# Altium PCB FOB - lower.PcbDoc
Units mm, origin at the board's own origin, x right, y up, seen from the top; angles counter-clockwise.
Board outline 54.5 x 16.6 mm, 2 copper layers (Top Layer, Bottom Layer); 25 components, 55 nets, 111 pads, 119 vias.
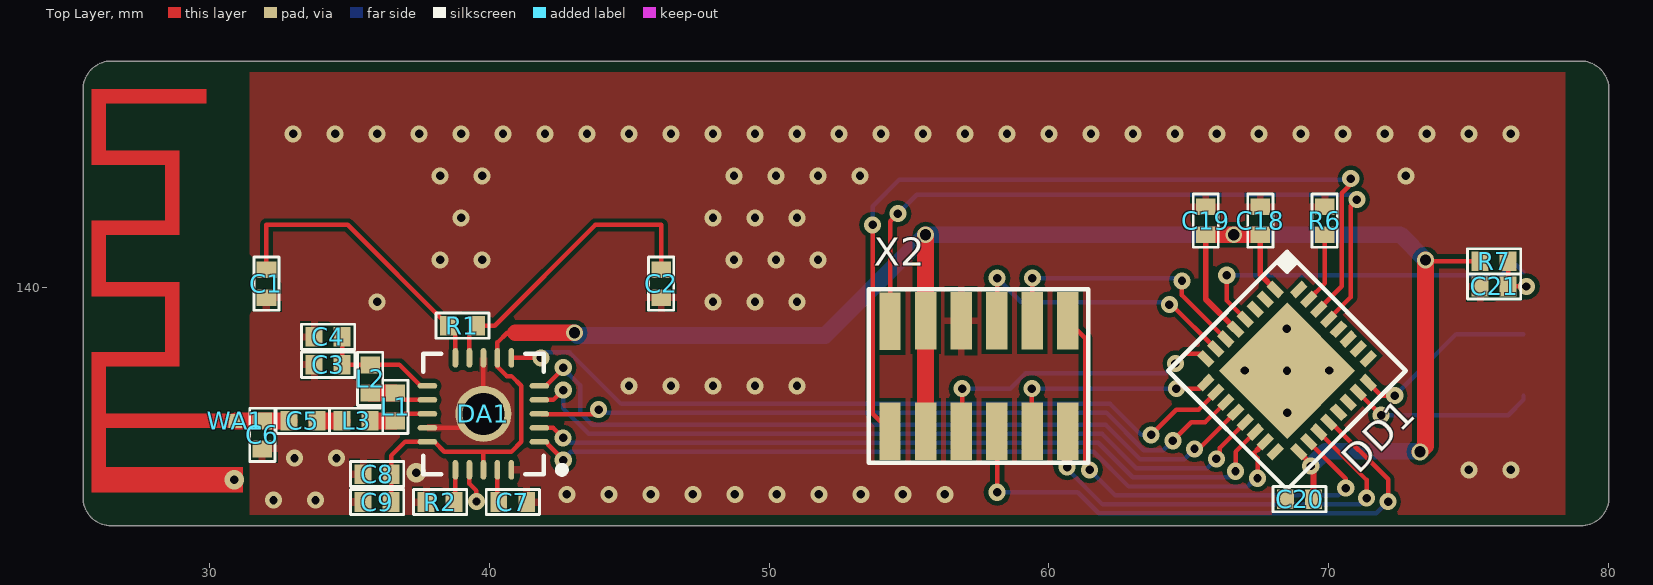
[diagram p0: Top Layer view]
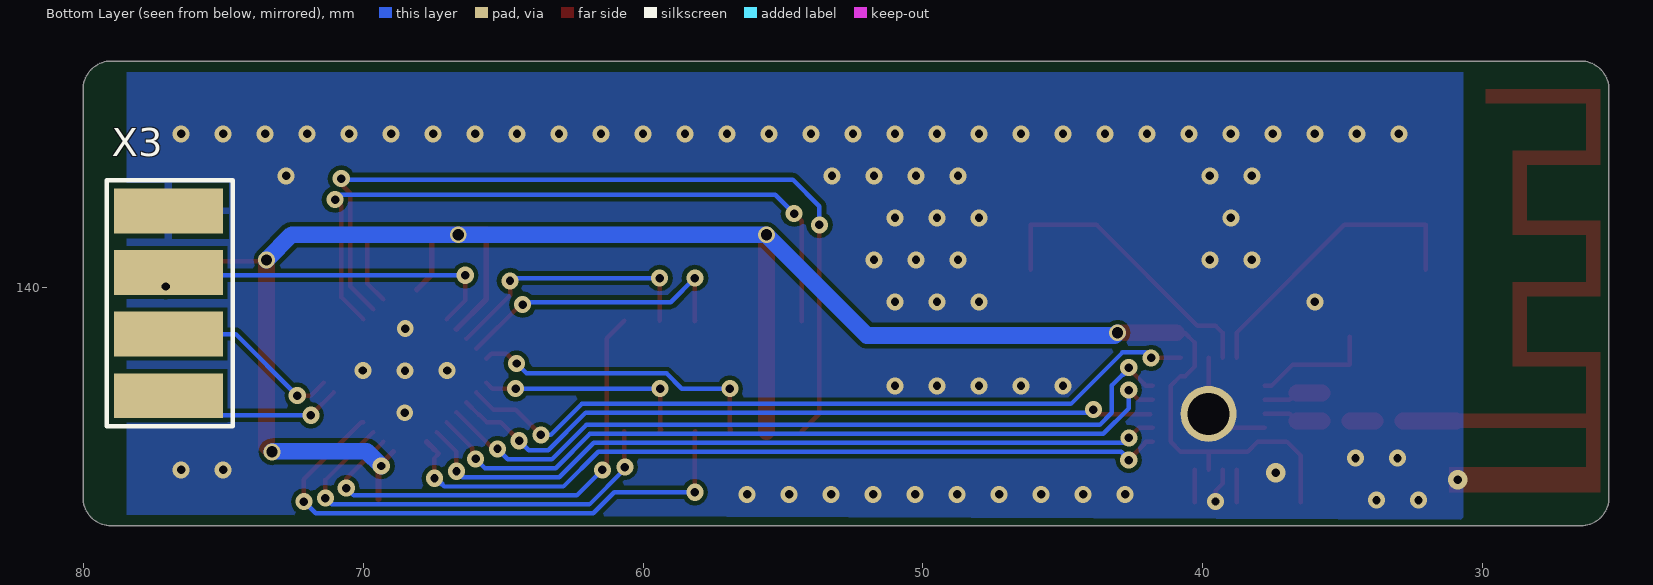
[diagram p1: Bottom Layer view, seen from below]
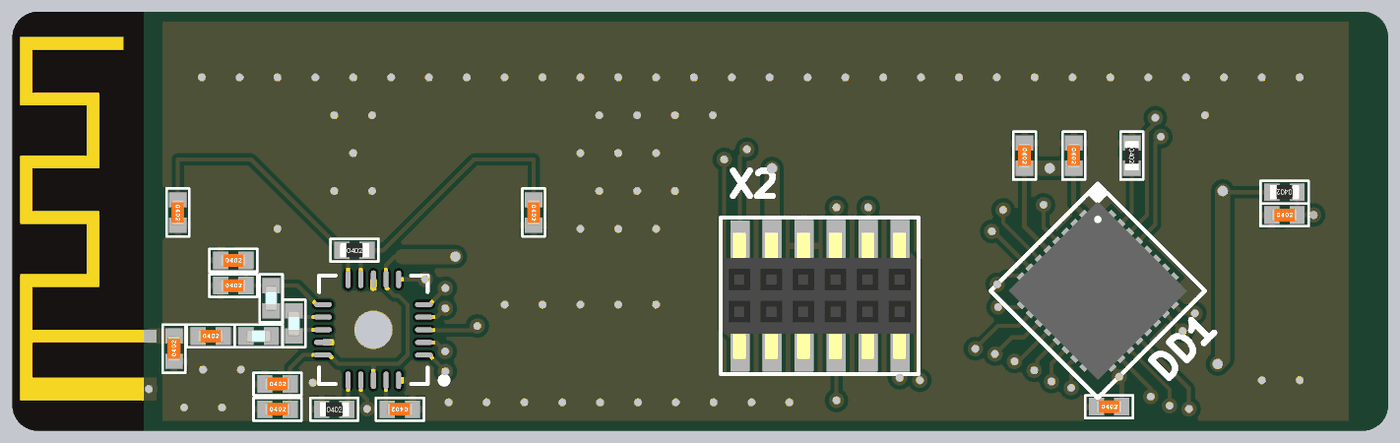
[diagram p2: 3D render of the assembled board from above, using the file's embedded part models]

## Layer stack, top to bottom
Top Solder: solder mask 0.0102, Solder Resist, Dk 3.5
Top Layer: signal copper 0.0356
Dielectric 1: dielectric 0.32, FR-4, Dk 4.8
Bottom Layer: signal copper 0.0356
Bottom Solder: solder mask 0.0102, Solder Resist, Dk 3.5

## Board outline
26.5,131.5 cw(c26.5,132.5) 25.5,132.5 25.5,147.1 cw(c26.5,147.1) 26.5,148.1 79,148.1 cw(c79,147.1) 80,147.1 80,132.5 cw(c79,132.5) 79,131.5

## Design rules (kind name [scope] priority, off if disabled: settings)
Clearance [All] p1: gap=0.16
PolygonConnect PolygonConnect_Direct [((InComponent('DA1') and HasRoundHole) or IsVia) or InNet('SW')or InNet('VCC1')] p1: connectstyle=Direct reliefconductorwidth=0.254 reliefentries=4 polygonreliefangle="90 Angle" airgapwidth=0.254
PolygonConnect [All] p2: connectstyle=Relief reliefconductorwidth=0.254 reliefentries=4 polygonreliefangle="90 Angle" airgapwidth=0.2
RoutingVias [All] p1: holewidth=0.3 width=0.61 viastyle="Through Hole" minholewidth=0.3 minwidth=0.61 maxholewidth=1 maxwidth=1.5
ShortCircuit ShortCircuit_1 [InNet('NetC5_1') vs InNet('GND2')] p1: allowed=TRUE
ShortCircuit [All] p2: allowed=FALSE
SolderMaskExpansion [All] p1: expansion=0.102
Width [All] p1: maxlimit=3 minlimit=0.16 preferedwidth=0.16 minimp=50.000000 maximp=50.000000 favimp=50.000000
29 further rules are at their usual default settings.

## Classes and differential pairs
component class FOB: X2
component class U_MCU: C18 C19 C20 C21 DD1 R6 R7 X3
component class U_Radio: C1 C2 C3 C4 C5 C6 C7 C8 C9 L1 L2 L3 R1 R2 WA1

## Components (designator, comment, footprint, x,y, rotation, side; value= is the part's Value field where it differs from the comment)
C1 "Конденсатор" CHIP_0402_C 32.05,140.15 r270 top
C2 "Конденсатор" CHIP_0402_C 46.15,140.15 r270 top
C3 "Конденсатор" CHIP_0402_C 34.25,137.25 r0 top
C4 "Конденсатор" CHIP_0402_C 34.25,138.25 r0 top
C5 "Конденсатор" CHIP_0402_C 33.35,135.25 r0 top
C6 "Конденсатор" CHIP_0402_C 31.9,134.75 r90 top
C7 "Конденсатор" CHIP_0402_C 40.85,132.35 r180 top
C8 "Конденсатор" CHIP_0402_C 36,133.35 r0 top
C9 "Конденсатор" CHIP_0402_C 36,132.35 r0 top
C18 "Конденсатор" CHIP_0402_C 67.55,142.4 r270 top
C19 "Конденсатор" CHIP_0402_C 65.6,142.4 r270 top
C20 "Конденсатор" CHIP_0402_C 68.95,132.45 r0 top
C21 "Конденсатор" CHIP_0402_C 75.9,140.05 r0 top
DA1 "nRF24L01+" "QFN-20 - DIY" 39.8,135.5 r180 top
DD1 "STM32F0xx_32" UFQFPN32 68.503,137.043 r225 top
L1 "Дроссель" CHIP_0402_L 36.65,135.75 r270 top
L2 "Дроссель" CHIP_0402_L 35.75,136.75 r270 top
L3 "Дроссель" CHIP_0402_L 35.25,135.25 r0 top
R1 "Резистор" CHIP_0402_R 39.05,138.65 r0 top
R2 "Резистор" CHIP_0402_R 38.25,132.35 r0 top
R6 "Резистор" CHIP_0402_R 69.85,142.4 r270 top
R7 "Резистор" CHIP_0402_R 75.9,140.95 r180 top
WA1 "Antenna" "ANTENNA PCB 2.4" 31.2,132.7 r90 top net-tie
X2 "PBD-12" "PBD1.27-12 SMD" 57.5,136.85 r0 top
X3 "SWD for STM32" "STM32 SWD-4" 76.95,139.45 r90 bottom

## Footprints (in the part's own frame and the unit in brackets; to place one, negate y for a bottom-side part, rotate by r counter-clockwise, add the part's x,y. Pads: shape width x height; smd on the part's side, far side on the other; paste and mask are expansions set on the pad)
"ANTENNA PCB 2.4" [mm]
  rect 0.5x0.5 smd paste+0 mask+0: 1(2.55,0.25)
  Top Layer pour cut-out: -0.5,0.5 14.7,0.5 14.7,5.7 -0.5,5.7
  Top Layer region: 0,0 0.9,0 0.9,4.9 2.3,4.9 2.3,0 2.8,0 2.8,4.9 4.5,4.9 4.5,2.26 7.5,2.26 7.5,4.9 9.2,4.9 9.2,2.26 12.2,2.26 12.2,4.9 13.9,4.9 13.9,1.3 14.4,1.3 14.4,5.4 11.7,5.4 11.7,2.76 9.7,2.76 9.7,5.4 7,5.4 7,2.76 5,2.76 5,5.4 0,5.4
  Bottom Layer pour cut-out: -0.5,0.5 14.7,0.5 14.7,5.7 -0.5,5.7
CHIP_0402_C [mm]
  rect 0.6x0.7 smd paste+0 mask+0: 1(-0.5,0) 2(0.5,0)
  silkscreen extent -0.95,-0.45 0.95,0.45, body extent -0.51,-0.25 0.51,0.25, height 0.51
CHIP_0402_L [mm]
  rect 0.6x0.7 smd paste+0 mask+0: 1(-0.5,0) 2(0.5,0)
  silkscreen extent -0.95,-0.45 0.95,0.45, body extent -0.5,-0.25 0.5,0.25, height 0.5
CHIP_0402_R [mm]
  rect 0.6x0.7 smd paste+0 mask+0: 1(-0.5,0) 2(0.5,0)
  silkscreen extent -0.95,-0.45 0.95,0.45, body extent -0.58,-0.27 0.57,0.28, height 0.41
"PBD1.27-12 SMD" [mm]
  rect 0.76x2.05 smd paste+0 mask+0: 1(-3.175,1.955) 2(-3.175,-1.975) 3(-1.905,1.975) 4(-1.905,-1.975) 5(-0.635,1.975) 6(-0.635,-1.975) 7(0.635,1.975) 8(0.635,-1.975) 9(1.905,1.975) 10(1.905,-1.975) 11(3.175,1.975) 12(3.175,-1.975)
  silkscreen extent -3.94,-3.1 3.9,3.1, body extent -3.84,-2.5 3.78,2.5, height 4.5
"QFN-20 - DIY" [mm] "QFN, 20-Leads, Body 4,00x4,00mm, Pitch 0,50mm, Thermal Pad 2,60x2,60mm, IPC Medium Density"
  oval 0.7x0.2 smd: 1(-2,1) 2(-2,0.5) 3(-2,0) 4(-2,-0.5) 5(-2,-1) 11(2,-1) 12(2,-0.5) 13(2,0) 14(2,0.5) 15(2,1)
  oval 0.2x0.7 smd: 6(-1,-2) 7(-0.5,-2) 8(0,-2) 9(0.5,-2) 10(1,-2) 16(1,2) 17(0.5,2) 18(0,2) 19(-0.5,2) 20(-1,2)
  round 2 hole 1.5 paste+0: EP(0,0)
  silkscreen extent -2.93,-2.15 2.15,2.15, body extent -2,-2 2,2, height 0.9
"STM32 SWD-4" [mm]
  rect 1.6x3.9 smd: 1(-3.3,0) 2(-1.1,0) 3(1.1,0) 4(3.3,0)
  silkscreen extent -4.4,-2.3 4.4,2.2
UFQFPN32 [mm]
  rect 0.3x0.6 smd paste+0 mask+0: 1(-1.75,-2.35) 2(-1.25,-2.35) 3(-0.75,-2.35) 4(-0.25,-2.35) 5(0.25,-2.35) 6(0.75,-2.35) 7(1.25,-2.35) 8(1.75,-2.35) 17(1.75,2.35) 18(1.25,2.35) 19(0.75,2.35) 20(0.25,2.35) 21(-0.25,2.35) 22(-0.75,2.35) 23(-1.25,2.35) 24(-1.75,2.35)
  rect 0.6x0.3 smd paste+0 mask+0: 9(2.35,-1.75) 10(2.35,-1.25) 11(2.35,-0.75) 12(2.35,-0.25) 13(2.35,0.25) 14(2.35,0.75) 15(2.35,1.25) 16(2.35,1.75) 25(-2.35,1.75) 26(-2.35,1.25) 27(-2.35,0.75) 28(-2.35,0.25) 29(-2.35,-0.25) 30(-2.35,-0.75) 31(-2.35,-1.25) 32(-2.35,-1.75)
  rect 3.45x3.45 smd paste+0 mask+0: 33(0,0)
  silkscreen extent -3,-3 3,3, body extent -2.5,-2.5 2.5,2.5, height 0.55

## Part data
DA1: "RF, 2.4 GHz Transceiver"
DD1: "MCU, 32-leaded"
X3: library part SWD_STM32, "Конт. площадки для подключения SWD"

## Via types
v1: diameter 0.61, hole 0.3, Top Layer to Bottom Layer, tented both sides, 107 vias
v2: diameter 0.6, hole 0.3, Top Layer to Bottom Layer, tented both sides, 5 vias
v3: diameter 0.6, hole 0.4, Top Layer to Bottom Layer, tented both sides, 4 vias
v4: diameter 0.7, hole 0.3, Top Layer to Bottom Layer, tented both sides, 2 vias
v5: diameter 0.61, hole 0.4, Top Layer to Bottom Layer, tented both sides, 1 vias

## Nets (pads, with @x,y where several pads share a name; then routed paths per layer and width w, separated by ;. In a path a pad name is that pad's centre, name@x,y a point inside that pad or via, vN(x,y) a via of type N, cw(c..) or ccw(c..) an arc to the next point about the centre after c; other vN are vias at no path point)
ANT1: DA1.12 L1.1 L2.2 | length 2.2
  Top Layer w0.16: L1.1 36.9,136 DA1.12
  Top Layer w0.6: L2.2 L1.1
ANT2: DA1.13 L1.2 L3.2 | length 2.2
  Top Layer w0.16: L1.2 36.9,135.5 DA1.13
  Top Layer w0.6: L3.2 L1.2
GND1: 
GND2: C1.2 C2.2 C3.1 C4.1 C6.1 C7.1 C8.1 C9.1 C18.1 C19.1 C20.1 C21.1 DA1.8 DA1.14 DA1.17 DA1.20 DA1.EP DD1.33 R2.1 R6.1 X2.5 X3.4 | length 6.2
  Top Layer w0.16: DA1.14 DA1.EP@39.25,135 ; DA1.17 39.3,133 39.55,132.75 v1(39.55,132.368) ; DA1.EP@39.3,135 DA1.EP ; DA1.8 DA1.EP ; DA1.EP@40.35,134.95 DA1.EP
  other v1: 32.3,132.421 33.8,132.421 42.782,132.623 44.282,132.623 45.782,132.623 47.282,132.623 48.782,132.623 50.282,132.623 51.782,132.623 53.282,132.623 54.782,132.623 56.282,132.623 75,133.5 76.5,133.5 33.05,133.921 34.55,133.921 45,136.5 46.5,136.5 48,136.5 49.5,136.5 51,136.5 36,139.5 48,139.5 49.5,139.5 51,139.5 38.25,141 39.75,141 48.75,141 50.25,141 51.75,141 39,142.5 48,142.5 49.5,142.5 51,142.5 38.25,144 39.75,144 48.75,144 50.25,144 51.75,144 53.25,144 72.75,144 33,145.5 34.5,145.5 36,145.5 37.5,145.5 39,145.5 40.5,145.5 42,145.5 43.5,145.5 45,145.5 46.5,145.5 48,145.5 49.5,145.5 51,145.5 52.5,145.5 54,145.5 55.5,145.5 57,145.5 58.5,145.5 60,145.5 61.5,145.5 63,145.5 64.5,145.5 66,145.5 67.5,145.5 69,145.5 70.5,145.5 72,145.5 73.5,145.5 75,145.5 76.5,145.5
  other v2: 68.51,135.54 68.503,137.043 67,137.05 70.005,137.05 68.496,138.546
  other v4: 30.9,133.15 37.4,133.4
NetBQ1_1: 
NetBQ1_2: 
NetC3_2: C3.2 C4.2 DA1.11 L2.1 | length 4.4
  Top Layer w0.16: C4.2 C3.2 L2.1 36.8,137.25 37.55,136.5 DA1.11
NetC5_1: C5.1 C6.2 WA1.1 | length 1.9
  Top Layer w0.6: WA1.1 C6.2 C5.1
NetC5_2: C5.2 L3.1 | length 0.9
  Top Layer w0.6: C5.2 L3.1
NetC7_2: C7.2 DA1.19 | length 1.2
  Top Layer w0.16: C7.2@40.3,132.35 DA1.19
NetC11_1: 
NetC11_2: 
NetC13_1: 
NetC13_2: 
NetC14_2: 
NetC15_2: 
NetC16_2: 
NetDD1_6: DD1.6 X2.9 | length 9.6
  Top Layer w0.16: X2.9 v1(59.405,140.35) ; v1(64.75,140.25) 64.75,139.735 DD1.6
  Bottom Layer w0.16: v1(59.405,140.35) 64.65,140.35 v1(64.75,140.25)
NetDD1_7: DD1.7 X2.7 | length 10.6
  Top Layer w0.16: X2.7 58.15,138.81 v1(58.15,140.35) ; v1(64.3,139.4) 64.378,139.4 DD1.7
  Bottom Layer w0.16: v1(58.15,140.35) 59.01,139.49 64.39,139.49 v1(64.3,139.4)
NetDD1_8: DD1.8 X2.6 | length 10.9
  Top Layer w0.16: X2.6 56.9,134.91 56.865,134.945 56.9,134.98 v1(56.9,136.402) ; v1(64.517,137.3) 64.867,137.65 65.421,137.65 DD1.8
  Bottom Layer w0.16: v1(56.9,136.402) 58.618,136.402 59.161,136.945 64.162,136.945 v1(64.517,137.3)
NetDD1_9: DD1.9 X2.10 | length 7.9
  Top Layer w0.16: v1(59.386,136.4) 59.386,134.994 59.4,134.98 59.35,134.93 X2.10 ; v1(64.553,136.4) 65.385,136.4 DD1.9
  Bottom Layer w0.16: v1(59.386,136.4) v1(64.553,136.4)
NetDD1_18: DD1.18 X2.11 | length 17.6
  Top Layer w0.16: X2.11 61.3,138.2 61.3,133.5 v1(61.45,133.5) ; DD1.18 70.6,133.178 v1(70.6,132.85)
  Bottom Layer w0.16: v1(61.45,133.5) 62.365,132.585 70.335,132.585 v1(70.6,132.85)
NetDD1_19: DD1.19 X2.12 | length 15.8
  Top Layer w0.16: v1(60.65,133.6) 60.677,133.6 60.675,133.602 X2.12 ; DD1.19 71.345,133.14 v1(71.345,132.49)
  Bottom Layer w0.16: v1(60.65,133.6) 60.65,133.529 61.914,132.265 71.12,132.265 v1(71.345,132.49)
NetDD1_31: DD1.31 R6.2 | length 2.5
  Top Layer w0.16: DD1.31 69.85,140.158 R6.2
NetGB1_+: 
NetHG1_11: 
NetHG1_18: 
NetHG1_19: 
NetHG1_26: 
NetR8_1: 
NetR9_1: 
NRST: C21.2 DD1.4 R7.1 X3.3 | length 14.3
  Top Layer w0.16: v1(66.35,140.45) 66.35,139.549 DD1.4 ; R7.1 C21.2 v1(77.05,140.05)
  Bottom Layer w0.16: v1(66.35,140.45) 76.15,140.45 76.6,140.9 X3.3
PUSH: DD1.20 X2.8 | length 20.4
  Top Layer w0.16: X2.8 58.15,134.86 v1(58.15,132.7) ; DD1.20 70.069,135.204 72.115,133.159 v1(72.115,132.365)
  Bottom Layer w0.16: v1(58.15,132.7) 61.026,132.7 61.781,131.945 71.695,131.945 v1(72.115,132.365)
RADIO_CE: DA1.1 DD1.15 | length 28.3
  Top Layer w0.16: DA1.1 42.05,134.5 42.099,134.451 42.099,134.418 42.566,133.95 42.621,133.95 42.65,133.921 v1(42.65,133.85) ; v1(67.45,133.2) 67.45,133.923 67.3,134.073 67.45,134.222
  Top Layer w0.2: 67.45,134.222 DD1.15
  Bottom Layer w0.16: v1(42.65,133.85) 42.65,133.93 42.708,133.93 42.923,134.145 61.604,134.145 62.844,132.905 67.105,132.905 67.2,133
  Bottom Layer w0.2: 67.2,133 67.4,133.2 v1(67.45,133.2)
RADIO_IREF: DA1.16 R2.2 | length 1.1
  Top Layer w0.16: R2.2@38.8,132.35 DA1.16
RADIO_IRQ: DA1.6 DD1.10 | length 27
  Top Layer w0.16: DA1.6 v1(41.85,137.5) ; v1(63.65,134.75) 64.552,135.651 65.343,135.651 DD1.10
  Bottom Layer w0.16: v1(41.85,137.5) 42.045,137.695 42.876,137.695 44.715,135.855 62.185,135.855 63.29,134.75 v1@63.573,134.75
RADIO_MISO: DA1.5 DD1.12 | length 27.8
  Top Layer w0.16: DA1.5 42.044,136.5 42.105,136.561 42.105,136.576 42.65,137.121 v1(42.65,137.15) ; v1(65.2,134.25) 65.356,134.25 DD1.12
  Bottom Layer w0.16: v1(42.65,137.15) 42.621,137.121 42.847,136.895 42.876,136.895 43.256,136.514 43.256,135.54 43.691,135.105 62.03,135.105 63.255,133.88 64.83,133.88 v1(65.2,134.25)
RADIO_MOSI: DA1.4 DD1.13 | length 27.7
  Top Layer w0.16: DA1.4 42.3,136 v1(42.65,136.35) ; v1(65.98,133.895) 66.107,134.022 66.107,134.294 DD1.13
  Bottom Layer w0.16: v1(42.65,136.35) 42.65,135.694 43.559,134.785 61.897,134.785 63.122,133.56 65.645,133.56 v1(65.98,133.895)
RADIO_NCS: DA1.2 DD1.14 | length 27.4
  Top Layer w0.16: DA1.2 42.287,135 v1(42.644,134.643) ; v1(66.664,133.45) 66.664,134.144 DD1.14
  Bottom Layer w0.16: v1(42.644,134.643) 42.822,134.465 61.764,134.465 62.989,133.24 66.454,133.24 v1(66.664,133.45)
RADIO_SCK: DA1.3 DD1.11 | length 25.8
  Top Layer w0.16: DA1.3@41.88,135.48 43.747,135.48 v1(43.917,135.65) ; v1(64.425,134.541) 65.081,135.196 65.575,135.196 65.853,135.475 65.874,135.475 DD1.11 DD1.11
  Bottom Layer w0.16: v1(43.917,135.65) 44.032,135.535 62.052,135.535 63.387,134.2 64.084,134.2 v1(64.425,134.541)
SCL: DD1.29 X2.1 | length 25.4
  Top Layer w0.16: X2.1 54.325,142.375 v1(54.6,142.65) ; DD1.29 70.779,139.673 70.779,142.929 v1(71,143.15)
  Bottom Layer w0.16: v1(54.6,142.65) 55.281,143.331 70.819,143.331 v1(71,143.15)
SDA: DD1.30 X2.2 | length 31.1
  Top Layer w0.16: v1@53.7,142.45 v1(53.7,142.25) 53.7,135.5 X2.2 ; DD1.30 70.455,140.056 70.455,143.376 70.779,143.7 v1(70.779,143.9)
  Bottom Layer w0.16: v1(53.7,142.25) 53.7,142.921 54.649,143.87 70.749,143.87 v1(70.779,143.9)
SW: 
SW_DN: 
SW_L: 
SW_PUSH: 
SW_R: 
SW_UP: 
SWCLK: DD1.24 X3.2 | length 6.7
  Top Layer w0.16: DD1.24 71.87,136.15 v1(72.35,136.15)
  Bottom Layer w0.16: v1(72.35,136.15) 74.55,138.35 X3.2
SWDIO: DD1.23 X3.1 | length 6.6
  Top Layer w0.16: DD1.23 v1(71.863,135.45)
  Bottom Layer w0.16: v1(71.863,135.45) 76.4,135.45 76.95,136 X3.1
VBAT: 
VCC1: 
VCC2: C8.2 C9.2 C18.2 C19.2 C20.2 DA1.7 DA1.15 DA1.18 DD1.1 DD1.5 DD1.17 R7.2 X2.3 X2.4 | length 76.5
  Top Layer w0.16: C9.2 C8.2 36.5,134 37,134.5 DA1.15 38.05,134.5 38.4,134.15 39.8,134.15 ; DA1.18 39.8,134.15 ; 40.95,138.4 40.65,138.4 40.3,138.05 DA1.7 40.3,137.184 40.634,136.85 40.8,136.85 41.15,136.5 41.15,134.5 40.8,134.15 39.8,134.15 ; v3(73.45,141) 73.5,140.95 R7.2
  Top Layer w0.2: C19.2 65.6,139.592 DD1.5 ; C18.2 67.55,140.47 DD1.1 ; DD1.17 v1@69.392,133.679 ; C20.2 v1@69.45,133.621
  Top Layer w0.6: 40.95,138.4 v3(43.05,138.4) ; X2.4 X2.3 v3(55.595,141.895) ; C19.2 v3(66.6,141.9) C18.2 ; v5(73.25,134.144) 73.45,134.344 v3(73.45,141)
  Bottom Layer w0.6: v3(43.05,138.4) 43.15,138.3 52,138.3 v3(55.595,141.895) v3@66.6,141.895 ; v3(66.6,141.9) 72.55,141.9 v3(73.45,141) ; v1(69.35,133.637) 69.877,134.165 73.229,134.165 v5(73.25,134.144)
XC1: C1.1 DA1.10 R1.1 | length 10.8
  Top Layer w0.16: C1.1 32.05,142.25 34.95,142.25 R1.1 38.8,138.4 DA1.10
XC2: C2.1 DA1.9 R1.2 | length 10.9
  Top Layer w0.16: DA1.9 39.3,138.4 R1.2 40.2,138.65 43.8,142.25 46.15,142.25 C2.1
pads on no net: DD1.2 DD1.3 DD1.16 DD1.21 DD1.22 DD1.25 DD1.26 DD1.27 DD1.28 DD1.32

## Polygon pours and split planes (outlines as drawn)
GND2 on Top Layer "GND-Radio" (solid, pour order 0): 31.45,131.9 31.45,147.7 78.45,147.7 78.45,131.9
GND2 on Bottom Layer "GND-Radio" (solid, pour order 2): 30.7,131.725 30.7,147.7 78.45,147.7 78.45,131.9

## Silkscreen, mask and mechanical layers (free items; w line width, h text height)
Top Solder:
  region: 25.5,131.5 30.7,131.5 30.7,148.1 25.5,148.1
Mechanical 4:
  lines w0.05: 25.5,161.996 25.5,162.504 ; 27.024,161.742 25.5,162.25 ; 27.024,162.758 25.5,162.25 ; 46.25,162.25 25.5,162.25 ; 59.25,162.25 80,162.25 ; 78.476,161.742 80,162.25 ; 78.476,162.758 80,162.25 ; 80,161.996 80,162.504 ; 86.492,103.524 87,102 ; 86.492,146.576 87,148.1 ; 86.746,102 87.254,102 ; 86.746,148.1 87.254,148.1 ; 87,118.677 87,102 ; 87,131.423 87,148.1 ; 87.508,103.524 87,102 ; 87.508,146.576 87,148.1
  lines w0.15: 25.5,132.5 ccw(c26.5,132.5) 26.5,131.5 ; 25.5,147.1 cw(c26.5,147.1) 26.5,148.1 ; 79,131.5 ccw(c79,132.5) 80,132.5 ; 79,148.1 cw(c79,147.1) 80,147.1
  lines w0.16: 25.5,132.5 25.5,147.1 ; 26.5,131.5 79,131.5 ; 26.5,148.1 79,148.1 ; 80,132.5 80,147.1 ; 22.15,98.6 122.15,98.6 122.15,198.6 22.15,198.6 22.15,98.6
  text "54.5 (mm)" at 46.504,161.336 h1.52
  text "46.1 (mm)" at 87.914,118.931 h1.52 r90